# Altium PCB Mjollnir Prototype.PcbDoc (part 2 of 2)
Units mm, origin at the board's own origin, x right, y up, seen from the top; angles counter-clockwise.
Board outline 52 x 52 mm, 8 copper layers (S OT, G OU, S IU, G UD, G ID, S ID, G OD, S OD), stack 1.193 mm thick; 277 components, 187 nets, 947 pads, 173 vias.
Unrouted connection lines stored in the file: 461.
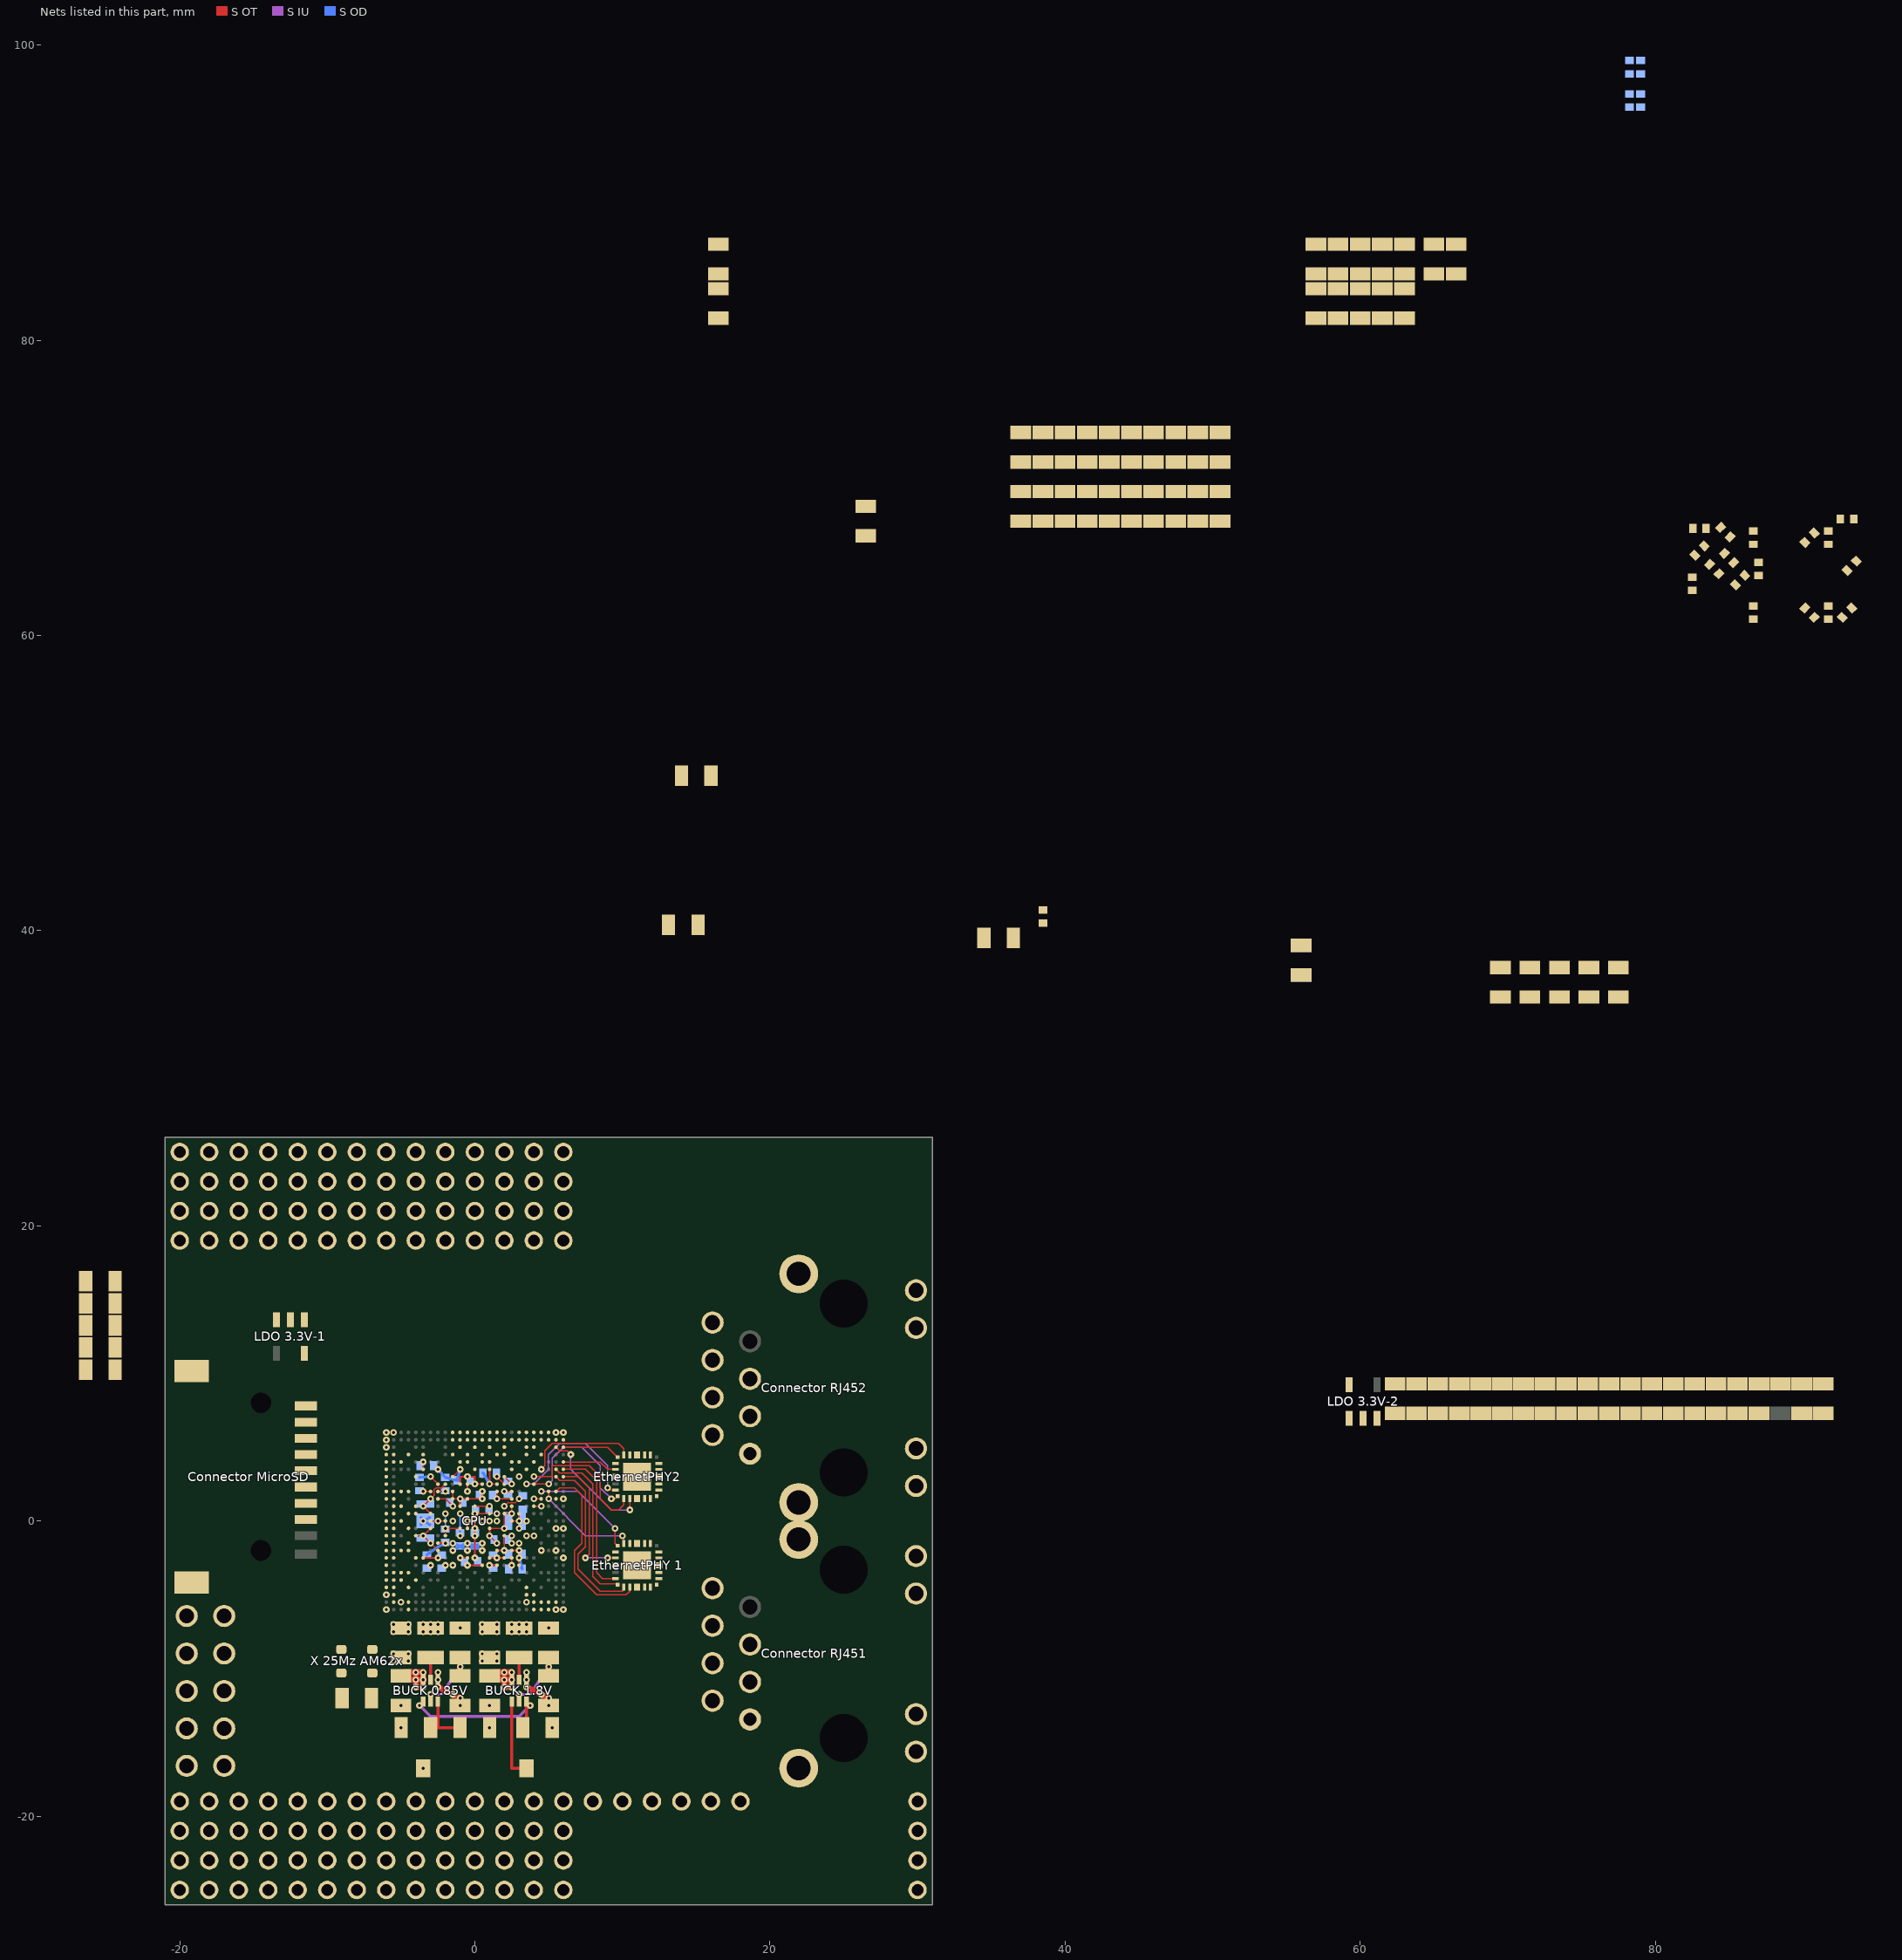
[diagram p8: the nets of this part, all layers, seen from the top]

## Part data
"BUCK 0.85V" "BUCK 1.8V": library part "Buck TLV62585PDLR", "Buck 3A 1500Mhz", MANUFACTURER_NAME="Texas Instruments", MANUFACTURER_PART_NUMBER=XTPS566247DRLR, Price="Rs. 24"
"C 1.8V Crystal" "C AM62x 0.85V-1" "C AM62x 0.85V-2" "C AM62x 0.85V-3" "C AM62x 0.85V-4" "C AM62x 0.85V-5" "C AM62x 0.85V-6" "C AM62x 0.85V-7" "C AM62x 0.85V-8" "C AM62x 0.85V-9" "C AM62x 0.85V-10" "C AM62x 0.85V-11" "C AM62x 0.85V-12" "C AM62x 0.85V-13" "C AM62x 0.85V-14" "C AM62x 1.8V-1" "C AM62x 1.8V-2" "C AM62x 1.8V-3" "C AM62x 1.8V-4" "C AM62x 1.8V-5" "C AM62x 1.8V-6" "C AM62x 1.8V-7" "C AM62x 1.8V-8" "C AM62x 1.8V-9" "C AM62x 1.8V-10" "C AM62x 1.8V-11" "C AM62x 1.8V-12" "C AM62x 1.8V-13" "C AM62x 1.8V-14" "C AM62x 3.3V-1" "C Backup-1" "C Backup-2" "C Backup-3" "C Backup-4" "C Backup-5" "C Backup-6" "C Backup-7" "C Backup-8" "C Backup-9" "C Backup-10" "C Backup-11" "C Backup-12" "C BUCK-0.85V-IN" "C BUCK-0.85V-OUT1" "C BUCK-1.8V-IN" "C BUCK-1.8V-OUT1" "C CAP_SOC VDDS5" "C EthernetPHY1-1" "C EthernetPHY1-2" "C EthernetPHY2-1" "C EthernetPHY2-2" "C EthernetPHY Earth" "C LDO 3.3V-1-IN" "C LDO 3.3V-1-OUT" "C LDO 3.3V-2-IN" "C LDO 3.3V-2-OUT" "C MMC-1" "C RJ451 RD1" "C RJ451 TD1" "C RJ452 RD1" "C RJ452 TD1": library part Capacitor, "Capacitor"
"Connector 1.8V Aux-1" "Connector 1.8V Aux-2" "Connector 5V-1" "Connector 5V-2" "Connector 5V-3" "Connector 5V-4" "Connector GND1" "Connector GND2" "Connector GND3" "Connector GND4" "Connector GND5" "Connector GND6" "Connector GND7" "Connector GND8" "Connector GND9" "Connector GND11" "Connector GND12" "Connector GND13" "Connector GND14" "Connector GND15" "Connector GND16" "Connector GND17" "Connector GND18" "Connector GND19" "Connector GND20" "Connector I2C0 SCL" "Connector I2C0 SDA" "Connector I2C1 SCL" "Connector I2C1 SDA" "Connector I2C2 SDA" "Connector IGBT UH" "Connector IGBT UL" "Connector IGBT VH" "Connector IGBT VL" "Connector IGBT WH" "Connector IGBT WL" "Connector JTAG 5V" "Connector JTAG GND-1" "Connector JTAG GND-2" "Connector JTAG RST" "Connector JTAG TCK" "Connector JTAG TDI" "Connector JTAG TDO" "Connector JTAG TMS" "Connector JTAG TX" "Connector JTAG UART RX" "Connector MCAN RX" "Connector MCAN TX" "Connector MCU I2C SCL" "Connector MCU I2C SDA" "Connector MCU MCAN0 RX" "Connector MCU MCAN0 TX" "Connector MCU MCAN1 RX" "Connector MCU MCAN1 TX" "Connector MCU RESETSTATZ" "Connector MCU SPI CLK" "Connector MCU SPI CS0" "Connector MCU SPI CS1" "Connector MCU SPI D0" "Connector MCU SPI D1" "Connector MCU UART CTS" "Connector MCU UART RTS" "Connector MCU UART RX" "Connector MCU UART TX" "Connector PRU0_GPIO0" "Connector PRU0_GPIO1" "Connector PRU0_GPIO2" "Connector PRU0_GPIO3" "Connector PRU0_GPIO4" "Connector PRU0_GPIO5" "Connector PRU0_GPIO6" "Connector PRU0_GPIO7" "Connector PRU0_GPIO8" "Connector PRU0_GPIO9" "Connector PRU0_GPIO10" "Connector PRU0_GPIO11" "Connector PRU0_GPIO12" "Connector PRU0_GPIO13" "Connector PRU0_GPIO14" "Connector PRU0_GPIO15" "Connector PRU0_GPIO16" "Connector PRU0_GPIO17" "Connector PRU0_GPIO18" "Connector PRU0_GPIO19" "Connector PRU1_GPIO0" "Connector PRU1_GPIO1" "Connector PRU1_GPIO2" "Connector PRU1_GPIO3" "Connector PRU1_GPIO4" "Connector PRU1_GPIO5" "Connector PRU1_GPIO6" "Connector PRU1_GPIO7" "Connector PRU1_GPIO8" "Connector PRU1_GPIO9" "Connector PRU1_GPIO10" "Connector PRU1_GPIO11" "Connector PRU1_GPIO12" "Connector PRU1_GPIO13" "Connector PRU1_GPIO14" "Connector PRU1_GPIO15" "Connector PRU1_GPIO16" "Connector PRU1_GPIO17" "Connector PRU1_GPIO18" "Connector PRU1_GPIO19" "Connector R5F CLOCKOUT" "Connector R5F I2C SCL" "Connector R5F I2C SDA" "Connector R5F UART CTS" "Connector R5F UART RTS" "Connector R5F UART RX" "Connector R5F UART TX" "Connector SPI CS0" "Connector SPI CS1" "Connector SPI D0" "Connector SPI D1" "Connector SPL CLK" "Connector UART0 FL" "Connector UART0 RX" "Connector UART0 TX" "Connector UART1 FL" "Connector UART1 RX" "Connector UART1 TX" "Connector UART2 RX" "Connector UART2 TX" "Connector UART3 RX" "Connector UART3 TX" "Connector UART4 RX" "Connector UART4 TX" "Connector UART5 RX" "Connector UART5 TX" "Connector UART6 RX" "Connector UART6 TX": "BergStrip"
"Connector MicroSD": library part "Connector MicroSD SameSky MSD-11-A", "MicroSD Slot", Link=https://roboticsdna.in/product/micro-sd-card-socket-adapter-self-pop-up-memory-card-slot-holder-2-pcs/, Price="Rs. 11"
"Connector RJ451" "Connector RJ452": "RJ45 With Magnetics 10/100Mbps"
CPU: "Quad Core A53", Price="Rs. 3113"
EthernetPHY2 "EthernetPHY 1": "PHY 10/100 Mbps", MANUFACTURER_NAME="Texas Instruments", MANUFACTURER_PART_NUMBER=DP83825IRMQR, Copyright="Copyright (C) 2025 Ultra Librarian. All rights reserved.", Datasheet=https://www.ti.com/lit/gpn/dp83825i, RefDes=RefDes, Type=Type
"L Buck 0.85V" "L Buck 1.8V": library part Inductor, "https://robu.in/product/tfm201610alm-1r0mtaa-tdk-3-1a-1uh-%c2%b120-4-3a-50m%cf%89-smd1-6x2mm-inductors-smd-rohs/"
"LDO 3.3V-1" "LDO 3.3V-2": library part "LDO TLV743xxPDBV", "LDO 300mA", MANUFACTURER_NAME="Texas Instruments", Datasheet=https://www.ti.com/lit/gpn/tlv755p, MANUFACTURER_PART_NUMBER=TLV743xxPDBV, Price="Rs. 9"
LED0 LED1 LED2 LED3 "LED 0.85V" "LED 1.8V" "LED 3.3V-1" "LED 3.3V-2" "LED 5V" "LED IGBT UH" "LED IGBT UL" "LED IGBT VH" "LED IGBT VL" "LED IGBT WH" "LED IGBT WL": library part LED, "LED"
"MDIO Pullup" "MMC SDCD Pulldown" "R BootStrap Down 3" "R BootStrap Down 4" "R BootStrap Down 5" "R BootStrap Down 7" "R BootStrap Down 8" "R BootStrap Down 10" "R BootStrap Down 11" "R BootStrap Down 12" "R BootStrap Down 13" "R BootStrap Down 14" "R BootStrap Down 15" "R BootStrap Up 0" "R BootStrap Up 1" "R BootStrap Up 2" "R BootStrap Up 6" "R BootStrap Up 9" "R BUCK-0.85V Divider-H" "R BUCK-0.85V Divider-L" "R BUCK-0.85V PG" "R BUCK-1.8V Divider-H" "R BUCK-1.8V Divider-L" "R BUCK-1.8V PG" "R EthernetPHY1 LED Act" "R EthernetPHY1 LED USER" "R EthernetPHY2 LED Act" "R EthernetPHY2 LED USER" "R EthernetPHY Earth" "R JTAG Pulldown RST" "R JTAG TDO" "R LED0" "R LED1" "R LED2" "R LED3" "R LED 0.85V" "R LED 1.8V" "R LED 3.3V-1" "R LED 3.3V-2" "R LED 5V" "R LED IGBT UH" "R LED IGBT UL" "R LED IGBT VH" "R LED IGBT VL" "R LED IGBT WH" "R LED IGBT WL" "R MCU_PORZ" "R MMC PULLUP CMD" "R MMC PULLUP D0" "R MMC PULLUP D1" "R MMC PULLUP D2" "R MMC PULLUP D3" "R RBIAS EthernetPHY1" "R RBIAS EthernetPHY2" "RMII2 Strap Address 1": library part Resistor, "Resistor"
"X 25Mz AM62x": "Crystal Oscilator CMOS Output", MANUFACTURER_NAME=ECS, MANUFACTURER_PART_NUMBER=ECS-2520MV-250-CN-TR, Mouser Part Number=520-2520MV-250-CN-T, Datasheet Link=https://www.arrow.com/en/products/ecs-2520mv-250-cn-tr/ecs-international, Geometry.Height=0.9mm, Mouser Price/Stock=https://www.mouser.co.uk/ProductDetail/ECS/ECS-2520MV-250-CN-TR?qs=fAHHVMwC%252BbiTva9uv8VI%2Fw%3D%3D

## Via types
v1: diameter 0.45, hole 0.2, S OT to S OD, tented both sides, 173 vias

## Nets (pads, with @x,y where several pads share a name; then routed paths per layer and width w, separated by ;. In a path a pad name is that pad's centre, name@x,y a point inside that pad or via, vN(x,y) a via of type N, cw(c..) or ccw(c..) an arc to the next point about the centre after c; other vN are vias at no path point)
0.85V: "C AM62x 0.85V-1.2" "C AM62x 0.85V-2.2" "C AM62x 0.85V-3.2" "C AM62x 0.85V-4.2" "C AM62x 0.85V-5.2" "C AM62x 0.85V-6.2" "C AM62x 0.85V-7.2" "C AM62x 0.85V-8.2" "C AM62x 0.85V-9.2" "C AM62x 0.85V-10.2" "C AM62x 0.85V-11.2" "C AM62x 0.85V-12.2" "C AM62x 0.85V-13.2" "C AM62x 0.85V-14.2" "C BUCK-0.85V-OUT1.2" "L Buck 0.85V.2" "LED 0.85V.1" "R BUCK-0.85V Divider-H.2" CPU.F8 CPU.H8 CPU.J11 CPU.J12 CPU.J14 CPU.K16 CPU.K17 CPU.L12 CPU.L15 CPU.M16 CPU.N8 CPU.N11 CPU.N12 CPU.N13 CPU.N14 CPU.P16 CPU.P17 CPU.R11 CPU.R12 CPU.R14 CPU.T10 CPU.U12 CPU.U14 CPU.V8 CPU.V15 CPU.V17 | length 16.2
  S OT w0.1: CPU.F8@-3.5,-2.5 v1(-2.5,-2.5) ; CPU.J11@-2,-1 v1(-2,-0.5) CPU.L12@-1,-0.5 ; CPU.K17@-1.5,2 CPU.K16@-1.5,1.5 v1(-1,1.5) ; CPU.L15@-1,1 v1(-1,1.5) ; v1(0,-2.5) v1(0,-1) v1(0,-0.5) CPU.N13@0,0 v1(0,0.5) CPU.R14@1,0.5 ; v1(0.5,2) v1(0.5,1.5) CPU.M16@-0.5,1.5 v1(-1,1.5) ; v1(1.5,-1.5) v1(1,-1) CPU.R12@1,-0.5 v1(2,-0.5) CPU.U14@2,0.5 v1(2.5,0.5) CPU.V15@2.5,1 ; v1(2,2) CPU.V17@2.5,2 ; v1(2.5,-3) CPU.V8@2.5,-2.5
  S OD w0.1: v1(-2,-0.5) v1(-2,0.5)
  other v1: -5.5,-7.5 -4.5,-7.5 -3.5,-7.5 -3,-7.5 -2.5,-7.5 -1,-7.25 -5.5,-7 -4.5,-7 -3.5,-7 -3,-7 -2.5,-7
"0.85V PG": "BUCK 0.85V.6" "R BUCK-0.85V PG.1" "R MCU_PORZ.1" CPU.D2 EthernetPHY2.5 | length 3.8
  S OT w0.2: -3,-14 -2.5,-14 ; -2.5,-12.24 -2.5,-14 ; -1,-14 -2.5,-14
1.8V: "C 1.8V Crystal.2" "C AM62x 1.8V-1.2" "C AM62x 1.8V-2.2" "C AM62x 1.8V-3.2" "C AM62x 1.8V-4.2" "C AM62x 1.8V-5.2" "C AM62x 1.8V-6.2" "C AM62x 1.8V-7.2" "C AM62x 1.8V-8.2" "C AM62x 1.8V-9.2" "C AM62x 1.8V-10.2" "C AM62x 1.8V-11.2" "C AM62x 1.8V-12.2" "C AM62x 1.8V-13.2" "C AM62x 1.8V-14.2" "C BUCK-1.8V-OUT1.2" "C EthernetPHY1-2.1" "C EthernetPHY2-2.1" "Connector 1.8V Aux-1.1" "Connector 1.8V Aux-2.1" "EthernetPHY 1.19" "L Buck 1.8V.2" "LED 1.8V.1" "R BUCK-0.85V PG.2" "R BUCK-1.8V Divider-H.2" "RMII2 Strap Address 1.2" "X 25Mz AM62x.1" "X 25Mz AM62x.4" CPU.E11 CPU.F11 CPU.F15 CPU.F20 CPU.G7 CPU.G10 CPU.G12 CPU.G14 CPU.G16 CPU.H9 CPU.J18 CPU.L11 CPU.L14 CPU.L18 CPU.M19 CPU.N18 CPU.P18 CPU.T7 CPU.T9 CPU.T19 CPU.U11 CPU.U15 CPU.U18 CPU.W16 CPU.W19 EthernetPHY2.19 | length 14.1
  S OT w0.083: -2.75,1.75 -2.75,2.125 -2.625,2.25 -2.25,2.25 CPU.J18@-2,2.5 ; 2.25,1.25 2.75,1.25
  S OT w0.1: CPU.E11@-4,-1 v1(-3.5,-1) ; CPU.F20@-3.5,3.5 v1(-3.5,4) ; CPU.G12@-3,-0.5 v1(-3.5,-1) ; CPU.G14@-3,0.5 v1(-3.5,1) v1(-3,1.5) -2.75,1.75 ; CPU.H9@-2.5,-2 v1(-3,-1.5) v1(-3.5,-1) ; CPU.L18@-1,2.5 -1,3 v1(-0.5,3) 0,3 v1(0,2.5) CPU.P18@0.5,2.5 ; v1(1,-3) CPU.T7@1.5,-3 ; CPU.T9@1.5,-2 v1(2,-2) CPU.U11@2,-1 ; v1(1.5,3) CPU.U18@2,2.5 ; v1(2,1) 2.25,1.25 ; 2.75,1.25 v1(3,1.5)
  S OD w0.1: v1(-1,-1) -1,-0.8 v1(-1,0.5)
  other v1: 1,-14 0.5,-7.5 1.5,-7.5 2.5,-7.5 3,-7.5 3.5,-7.5 5,-7.25 0.5,-7 1.5,-7 2.5,-7 3,-7 3.5,-7 -3,-3 3,3
"1.8V PG": "BUCK 0.85V.4" "BUCK 1.8V.6" "R BUCK-1.8V PG.1" | length 9.9
  S OT w0.2: 3.5,-14 3.5,-12.5 3.5,-12.24
  S IU w0.2: v1(-3.75,-12.5) -3,-13.25 3,-13.25 v1(3.75,-12.5)
3.3V: "EthernetPHY 1.3" "MDIO Pullup.1" "R BootStrap Up 0.2" "R BootStrap Up 1.2" "R BootStrap Up 6.2" "R BootStrap Up 9.2" EthernetPHY2.3
3.3V-1: "C AM62x 3.3V-1.2" "C LDO 3.3V-1-OUT.1" "C MMC-1.2" "Connector MicroSD.4" "LDO 3.3V-1.5" "LED 3.3V-1.1" "R MMC PULLUP CMD.1" "R MMC PULLUP D0.1" "R MMC PULLUP D1.1" "R MMC PULLUP D2.1" "R MMC PULLUP D3.1" CPU.G17 | length 0.5
  S OT w0.1: v1(-3.5,2) CPU.G17@-3,2
3.3V-2: "C EthernetPHY1-1.2" "C EthernetPHY2-1.1" "C LDO 3.3V-2-OUT.1" "EthernetPHY 1.5" "EthernetPHY 1.6" "LDO 3.3V-2.5" "LED 3.3V-2.1" EthernetPHY2.6
"3.3V-2 Enable": "LDO 3.3V-2.3"
5V: "BUCK 0.85V.3" "BUCK 1.8V.3" "C Backup-1.2" "C Backup-2.2" "C Backup-3.2" "C Backup-4.2" "C Backup-5.2" "C Backup-6.2" "C Backup-7.2" "C Backup-8.2" "C Backup-9.2" "C Backup-10.2" "C Backup-11.2" "C Backup-12.2" "C BUCK-0.85V-IN.2" "C BUCK-1.8V-IN.2" "C LDO 3.3V-1-IN.1" "C LDO 3.3V-2-IN.1" "Connector 5V-1.1" "Connector 5V-2.1" "Connector 5V-3.1" "Connector 5V-4.1" "Connector JTAG 5V.1" "LDO 3.3V-1.1" "LDO 3.3V-1.3" "LDO 3.3V-2.1" "LED 5V.1" "R BUCK-1.8V PG.2" | length 11.4
  S OT w0.4: v1(-4,-10.75) v1(-4,-11.25) v1(-3.5,-11.25) v1(-3.5,-10.75) ; v1(-4,-10.75) -4.75,-10.75 -5,-10.5 -4.75,-10.25 v1(-4,-10.25) ; v1(-4,-10.75) v1(-3.5,-10.75) ; v1(-4,-10.75) v1(-4,-10.25) ; v1(-4,-10.25) v1(-3.5,-10.25) v1(-3.5,-10.75) ; v1(2,-10.75) v1(2,-11.25) v1(2.5,-11.25) v1(2.5,-10.75) ; v1(2,-10.75) 1.25,-10.75 1,-10.5 1.25,-10.25 v1(2,-10.25) ; v1(2,-10.75) v1(2.5,-10.75) ; v1(2,-10.75) v1(2,-10.25) ; v1(2,-10.25) v1(2.5,-10.25) v1(2.5,-10.75)
  other v1: 5.25,-14
25Mhz: "X 25Mz AM62x.3" CPU.B2
"Buck 0.85V Feedback": "BUCK 0.85V.5" "R BUCK-0.85V Divider-H.1" "R BUCK-0.85V Divider-L.2" | length 4.3
  S OT w0.4: -1,-10.5 v1(-1,-9.875) -1,-9.25
  S IU w0.2: v1(-3,-11.75) -2.25,-11.75 v1(-1,-9.875)
"Buck 0.85V Inductor": "BUCK 0.85V.2" "L Buck 0.85V.1" | length 1.5
  S OT w0.2: -3,-10.76 -3,-9.25
"Buck 1.8V Feedback": "BUCK 1.8V.5" "R BUCK-1.8V Divider-H.1" "R BUCK-1.8V Divider-L.2" | length 4.3
  S OT w0.4: 5,-10.5 v1(5,-9.875) 5,-9.25
  S IU w0.2: v1(3,-11.75) 3.75,-11.75 v1(5,-9.875)
"Buck 1.8V Inductor": "BUCK 1.8V.2" "L Buck 1.8V.1" | length 1.5
  S OT w0.2: 3,-10.76 3,-9.25
"CAP_SOC VDDS5": "C CAP_SOC VDDS5.1" CPU.H17 | length 0.5
  S OT w0.1: CPU.H17@-2.5,2 v1(-2,2)
EARTH: "C EthernetPHY Earth.1" "Connector RJ451.8" "Connector RJ451.SH" "Connector RJ452.8" "Connector RJ452.SH" "R EthernetPHY Earth.1"
Enable: "BUCK 1.8V.4" Button.1 | length 5.5
  S OT w0.2: 2.5,-12.24 2.5,-16.75 Button.1@3.5,-16.75
Error: CPU.D1
"Ethernet1 RD_N": "Connector RJ451.6" "EthernetPHY 1.7"
"Ethernet1 RD_P": "Connector RJ451.3" "EthernetPHY 1.8"
"Ethernet1 TD_N": "Connector RJ451.2" "EthernetPHY 1.10"
"Ethernet1 TD_P": "Connector RJ451.1" "EthernetPHY 1.11"
"Ethernet2 RD_N": "Connector RJ452.6" EthernetPHY2.7
"Ethernet2 RD_P": "Connector RJ452.3" EthernetPHY2.8
"Ethernet2 TD_N": "Connector RJ452.2" EthernetPHY2.10
"Ethernet2 TD_P": "Connector RJ452.1" EthernetPHY2.11
"EthernetPHY1 LED Act": "EthernetPHY 1.4" "R EthernetPHY1 LED Act.2"
"EthernetPHY1 RBIAS": "EthernetPHY 1.14" "R RBIAS EthernetPHY1.1"
"EthernetPHY2 LED Act": "R EthernetPHY2 LED Act.2" EthernetPHY2.4
"EthernetPHY2 RBIAS": "R RBIAS EthernetPHY2.1" EthernetPHY2.14
GND: "BUCK 0.85V.1" "BUCK 1.8V.1" "C 1.8V Crystal.1" "C AM62x 0.85V-1.1" "C AM62x 0.85V-2.1" "C AM62x 0.85V-3.1" "C AM62x 0.85V-4.1" "C AM62x 0.85V-5.1" "C AM62x 0.85V-6.1" "C AM62x 0.85V-7.1" "C AM62x 0.85V-8.1" "C AM62x 0.85V-9.1" "C AM62x 0.85V-10.1" "C AM62x 0.85V-11.1" "C AM62x 0.85V-12.1" "C AM62x 0.85V-13.1" "C AM62x 0.85V-14.1" "C AM62x 1.8V-1.1" "C AM62x 1.8V-2.1" "C AM62x 1.8V-3.1" "C AM62x 1.8V-4.1" "C AM62x 1.8V-5.1" "C AM62x 1.8V-6.1" "C AM62x 1.8V-7.1" "C AM62x 1.8V-8.1" "C AM62x 1.8V-9.1" "C AM62x 1.8V-10.1" "C AM62x 1.8V-11.1" "C AM62x 1.8V-12.1" "C AM62x 1.8V-13.1" "C AM62x 1.8V-14.1" "C AM62x 3.3V-1.1" "C Backup-1.1" "C Backup-2.1" "C Backup-3.1" "C Backup-4.1" "C Backup-5.1" "C Backup-6.1" "C Backup-7.1" "C Backup-8.1" "C Backup-9.1" "C Backup-10.1" "C Backup-11.1" "C Backup-12.1" "C BUCK-0.85V-IN.1" "C BUCK-0.85V-OUT1.1" "C BUCK-1.8V-IN.1" "C BUCK-1.8V-OUT1.1" "C CAP_SOC VDDS5.2" "C EthernetPHY1-1.1" "C EthernetPHY1-2.2" "C EthernetPHY2-1.2" "C EthernetPHY2-2.2" "C EthernetPHY Earth.2" "C LDO 3.3V-1-IN.2" "C LDO 3.3V-1-OUT.2" "C LDO 3.3V-2-IN.2" "C LDO 3.3V-2-OUT.2" "C MMC-1.1" "C RJ451 RD1.1" "C RJ451 TD1.1" "C RJ452 RD1.1" "C RJ452 TD1.1" "Connector GND1.1" "Connector GND2.1" "Connector GND3.1" "Connector GND4.1" "Connector GND5.1" "Connector GND6.1" "Connector GND7.1" "Connector GND8.1" "Connector GND9.1" "Connector GND11.1" "Connector GND12.1" "Connector GND13.1" "Connector GND14.1" "Connector GND15.1" "Connector GND16.1" "Connector GND17.1" "Connector GND18.1" "Connector GND19.1" "Connector GND20.1" "Connector JTAG GND-1.1" "Connector JTAG GND-2.1" "Connector MicroSD.6" "Connector MicroSD.SH" "Connector RJ451.10" "Connector RJ451.11" "Connector RJ452.10" "Connector RJ452.11" "EthernetPHY 1.9" "EthernetPHY 1.21" "EthernetPHY 1.25" "LDO 3.3V-1.2" "LDO 3.3V-2.2" "MMC SDCD Pulldown.1" "R BootStrap Down 3.1" "R BootStrap Down 4.1" "R BootStrap Down 5.1" "R BootStrap Down 7.1" "R BootStrap Down 8.1" "R BootStrap Down 10.1" "R BootStrap Down 11.1" "R BootStrap Down 12.1" "R BootStrap Down 13.1" "R BootStrap Down 14.1" "R BootStrap Down 15.1" "R BootStrap Up 2.1" "R BUCK-0.85V Divider-L.1" "R BUCK-1.8V Divider-L.1" "R EthernetPHY Earth.2" "R JTAG Pulldown RST.2" "R LED0.1" "R LED1.1" "R LED2.1" "R LED3.1" "R LED 0.85V.1" "R LED 1.8V.1" "R LED 3.3V-1.1" "R LED 3.3V-2.1" "R LED 5V.1" "R LED IGBT UH.1" "R LED IGBT UL.1" "R LED IGBT VH.1" "R LED IGBT VL.1" "R LED IGBT WH.1" "R LED IGBT WL.1" "R MCU_PORZ.2" "R RBIAS EthernetPHY1.2" "R RBIAS EthernetPHY2.2" "X 25Mz AM62x.2" Button.2 CPU.A1 CPU.A3 CPU.A23 CPU.A24 CPU.A25 CPU.AA11 CPU.AB9 CPU.AD1 CPU.AD9 CPU.AD12 CPU.AD16 CPU.AD25 CPU.AE1 CPU.AE8 CPU.AE12 CPU.AE16 CPU.AE24 CPU.AE25 CPU.B25 CPU.C2 CPU.F13 CPU.G13 CPU.G19 CPU.H10 CPU.H13 CPU.H16 CPU.H18 CPU.H20 CPU.J7 CPU.J13 CPU.K7 CPU.K9 CPU.K10 CPU.K13 CPU.K15 CPU.K19 CPU.L8 CPU.L20 CPU.M7 CPU.M8 CPU.M9 CPU.M10 CPU.M12 CPU.M13 CPU.M17 CPU.M18 CPU.N15 CPU.P7 CPU.P9 CPU.P10 CPU.P13 CPU.R8 CPU.R13 CPU.R15 CPU.R18 CPU.R20 CPU.T8 CPU.T13 CPU.T14 CPU.T16 CPU.T17 CPU.T18 CPU.U8 CPU.U19 CPU.V9 CPU.V10 CPU.V11 CPU.V13 CPU.V16 CPU.V18 CPU.W7 CPU.W9 CPU.W10 CPU.W12 CPU.W13 CPU.W14 CPU.Y2 CPU.Y11 CPU.Y13 EthernetPHY2.9 EthernetPHY2.21 EthernetPHY2.25 | length 30
  S OT w0.1: CPU.G13@-3,0 v1(-2.5,0) CPU.J13@-2,0 ; v1(-3,3) CPU.H18@-2.5,2.5 ; CPU.H10@-2.5,-1.5 v1(-2,-1.5) ; CPU.H16@-2.5,1.5 -2,1.5 v1(-1.5,1) ; CPU.K19@-1.5,3 v1(-1,3.5) ; v1(-1,-2.5) CPU.M8@-0.5,-2.5 ; v1(-0.5,-3) CPU.P7@0.5,-3 ; CPU.M12@-0.5,-0.5 v1(-0.5,0) ; v1(-0.5,2) CPU.M18@-0.5,2.5 ; CPU.N15@0,1 v1(1,1) ; CPU.R8@1,-2.5 v1(1.5,-2.5) CPU.U8@2,-2.5 ; CPU.R20@1,3.5 v1(1,2.5) CPU.T18@1.5,2.5 ; CPU.T17@1.5,2 v1(1.5,1.5) CPU.V16@2.5,1.5 ; CPU.U19@2,3 v1(2.5,2.5) ; CPU.V9@2.5,-2 v1(3,-2) ; CPU.V13@2.5,0 v1(3,0) CPU.W14@3,0.5 ; CPU.W7@3,-3 v1(3,-2.5)
  S OT w0.4: v1(-2.5,-11.25) -2,-11.5 v1(-1.5,-11.75) v1(-1,-12) ; v1(3.5,-11.25) 4,-11.5 v1(4.5,-11.75) v1(5,-12)
  S OD w0.2: -3.75,2.95 v1(-3,3) ; -3.65,-0.25 v1(-3.5,0) ; -3.65,0.25 v1(-3.5,0) ; -3.25,-2.3 -2.5,-1.75 v1(-2,-1.5) ; -3.05,-0.25 -3.262,-0.132 v1(-3.5,0) ; -3.05,0.25 -3.262,0.132 v1(-3.5,0) ; v1(-2.5,3.5) -2,2.95 -1.2,2.75 v1(-1,3.5) ; v1(-1.5,-2) -1,-1.7 ; v1(-1.5,-1.5) -1,-1.7 ; v1(0.5,-2) 0,-1.7 ; v1(0.5,-1.5) 0,-1.7 ; 0.55,3.25 v1(1,2.5) ; v1(3,-2.5) 3.2,-3.25 ; -1,-1.7 v1(-0.5,-2) 0,-1.7 ; -1,-1.7 v1(-0.5,-1.5) 0,-1.7
  other v1: -3.5,-16.75 -5,-14 -5,-12.5 -1,-12.5 1,-12.5 5,-12.5 -2.5,-10.75 3.5,-10.75 -2.5,-10.25 3.5,-10.25 -5.5,-9.5 -4.5,-9.5 0.5,-9.5 1.5,-9.5 -5.5,-9 -4.5,-9 0.5,-9 1.5,-9 -6,-6 5.5,-6 6,-6 -5,-5.5 3.5,-5.5 -6,-5 -2,-3 -1.5,-3 6,-2.5 4.5,-2 5.5,-2 2.5,-1.5 3,-1.5 2.5,-1 3.5,-1 4,-1 3,-0.5 5.5,-0.5 6,-0.5 -1.5,0 0.5,0 1,0 1.5,0 3.5,0 1.5,0.5 6,1.5 -6,5 -6,5.5 -6,6 -5.5,6 5.5,6 6,6
"I2C0 SCL": "Connector I2C0 SCL.1" CPU.B16
"I2C0 SDA": "Connector I2C0 SDA.1" CPU.A16
"I2C1 SCL": "Connector I2C1 SCL.1" CPU.B17
"I2C1 SDA": "Connector I2C1 SDA.1" CPU.A17
"I2C2 SCL": "Connector I2C2 SDA.1" CPU.K24
"IGBT UH": "Connector IGBT UH.1" "LED IGBT UH.1" CPU.AB2
"IGBT UH*": "LED IGBT UH.2" "R LED IGBT UH.2"
"IGBT UL": "Connector IGBT UL.1" "LED IGBT UL.1" CPU.Y4
"IGBT UL*": "LED IGBT UL.2" "R LED IGBT UL.2"
"IGBT VH": "Connector IGBT VH.1" "LED IGBT VH.1" CPU.AA3
"IGBT VH*": "LED IGBT VH.2" "R LED IGBT VH.2"
"IGBT VL": "Connector IGBT VL.1" "LED IGBT VL.1" CPU.AA1
"IGBT VL*": "LED IGBT VL.2" "R LED IGBT VL.2"
"IGBT WH": "Connector IGBT WH.1" "LED IGBT WH.1" CPU.AB1
"IGBT WH*": "LED IGBT WH.2" "R LED IGBT WH.2"
"IGBT WL": "Connector IGBT WL.1" "LED IGBT WL.1" CPU.Y3
"IGBT WL*": "LED IGBT WL.2" "R LED IGBT WL.2"
"Input 0": "Connector PRU0_GPIO0.1" "R BootStrap Up 0.1" CPU.M25
"Input 1": "Connector PRU0_GPIO1.1" "R BootStrap Up 1.1" CPU.N23
"Input 2": "Connector PRU0_GPIO2.1" "R BootStrap Up 2.2" CPU.N24
"Input 3": "Connector PRU0_GPIO3.1" "R BootStrap Down 3.2" CPU.N25
"Input 4": "Connector PRU0_GPIO4.1" "R BootStrap Down 4.2" CPU.P24
"Input 5": "Connector PRU0_GPIO5.1" "R BootStrap Down 5.2" CPU.P22
"Input 6": "Connector PRU0_GPIO6.1" "R BootStrap Up 6.1" CPU.P21
"Input 7": "Connector PRU0_GPIO7.1" "R BootStrap Down 7.2" CPU.R23
"Input 8": "Connector PRU0_GPIO8.1" CPU.P25
"Input 9": "Connector PRU0_GPIO9.1" CPU.L23
"Input 10": "Connector PRU0_GPIO10.1" CPU.L24
"Input 11": "Connector PRU0_GPIO11.1" CPU.L25
"Input 12": "Connector PRU0_GPIO12.1" CPU.M24
"Input 13": "Connector PRU0_GPIO13.1" CPU.N20
"Input 14": "Connector PRU0_GPIO14.1" CPU.U23
"Input 15": "Connector PRU0_GPIO15.1" CPU.K25
"Input 16": "Connector PRU0_GPIO16.1" CPU.M22
"Input 17": "Connector PRU0_GPIO17.1" CPU.M21
"Input 18": "Connector PRU0_GPIO18.1" CPU.L21
"Input 19/I2C2 SDA": "Connector PRU0_GPIO19.1" CPU.K22
"JTAG RST": "Connector JTAG RST.1" "R JTAG Pulldown RST.1" CPU.B10
"JTAG TCK": "Connector JTAG TCK.1" CPU.A10
"JTAG TDI": "Connector JTAG TDI.1" CPU.A11
"JTAG TDO": "Connector JTAG TDO.1" "R JTAG TDO.2"
"JTAG TDO*": "R JTAG TDO.1" CPU.D12
"JTAG TMS": "Connector JTAG TMS.1" CPU.B11
LED0: CPU.AC2 LED0.1
LED0*: "R LED0.2" LED0.2
LED1: CPU.AD2 LED1.1
LED1*: "R LED1.2" LED1.2
LED2: CPU.AC1 LED2.1
LED2*: "R LED2.2" LED2.2
LED3: CPU.AA2 LED3.1
LED3*: "R LED3.2" LED3.2
"LED 0.85V": "LED 0.85V.2" "R LED 0.85V.2"
"LED 1.8V": "LED 1.8V.2" "R LED 1.8V.2"
"LED 3.3V-1": "LED 3.3V-1.2" "R LED 3.3V-1.2"
"LED 3.3V-2": "LED 3.3V-2.2" "R LED 3.3V-2.2"
"LED 5V": "LED 5V.2" "R LED 5V.2"
"MCAN RX": "Connector MCAN RX.1" CPU.E15
"MCAN TX": "Connector MCAN TX.1" CPU.C15
"MCU I2C SCL": "Connector MCU I2C SCL.1" CPU.A8
"MCU I2C SDA": "Connector MCU I2C SDA.1" CPU.D10
"MCU MCAN0 RX": "Connector MCU MCAN0 RX.1" CPU.B3
"MCU MCAN0 TX": "Connector MCU MCAN0 TX.1" CPU.D6
"MCU MCAN1 RX": "Connector MCU MCAN1 RX.1" CPU.D4
"MCU MCAN1 TX": "Connector MCU MCAN1 TX.1" CPU.E5
"MCU RESETSTATZ": "Connector MCU RESETSTATZ.1" CPU.B12
"MCU SPI CLK": "Connector MCU SPI CLK.1" CPU.A7
"MCU SPI CS0": "Connector MCU SPI CS0.1" CPU.E8
"MCU SPI CS1": "Connector MCU SPI CS1.1" CPU.B8
"MCU SPI D0": "Connector MCU SPI D0.1" CPU.D9
"MCU SPI D1": "Connector MCU SPI D1.1" CPU.C9
"MCU UART CTS": "Connector MCU UART CTS.1" CPU.A6
"MCU UART RTS": "Connector MCU UART RTS.1" CPU.B6
"MCU UART RX": "Connector MCU UART RX.1" CPU.B5
"MCU UART TX": "Connector MCU UART TX.1" CPU.A5
MDC: "EthernetPHY 1.16" CPU.AD24 EthernetPHY2.16
MDIO: "EthernetPHY 1.15" "MDIO Pullup.2" CPU.AB22 EthernetPHY2.15
MMC_CLK: "Connector MicroSD.3" CPU.B22
MMC_CMD: "Connector MicroSD.5" "R MMC PULLUP CMD.2" CPU.A21
MMC_D0: "Connector MicroSD.7" "R MMC PULLUP D0.2" CPU.A22
MMC_D1: "Connector MicroSD.8" "R MMC PULLUP D1.2" CPU.B21
MMC_D2: "Connector MicroSD.1" "R MMC PULLUP D2.2" CPU.C21
MMC_D3: "Connector MicroSD.2" "R MMC PULLUP D3.2" CPU.D22
"Output 0": "Connector PRU1_GPIO0.1" CPU.U22
"Output 1": "Connector PRU1_GPIO1.1" CPU.V24
"Output 2": "Connector PRU1_GPIO2.1" CPU.W25
"Output 3": "Connector PRU1_GPIO3.1" CPU.W24
"Output 4": "Connector PRU1_GPIO4.1" CPU.Y25
"Output 5": "Connector PRU1_GPIO5.1" CPU.Y24
"Output 6": "Connector PRU1_GPIO6.1" CPU.Y23
"Output 7": "Connector PRU1_GPIO7.1" CPU.AA25
"Output 8": "Connector PRU1_GPIO8.1" CPU.W21
"Output 9": "Connector PRU1_GPIO9.1" CPU.V20
"Output 10": "Connector PRU1_GPIO10.1" CPU.AA23
"Output 11": "Connector PRU1_GPIO11.1" CPU.AB25
"Output 12": "Connector PRU1_GPIO12.1" CPU.AA24
"Output 13": "Connector PRU1_GPIO13.1" CPU.Y22
"Output 14": "Connector PRU1_GPIO14.1" CPU.AA21
"Output 15": "Connector PRU1_GPIO15.1" CPU.AB24
"Output 16": "Connector PRU1_GPIO16.1" CPU.V21
"Output 17": "Connector PRU1_GPIO17.1" CPU.Y20
"Output 18": "Connector PRU1_GPIO18.1" CPU.AC25
"Output 19": "Connector PRU1_GPIO19.1" CPU.AC24
"R5F CLOCKOUT": "Connector R5F CLOCKOUT.1" CPU.A12
"R5F I2C SCL": "Connector R5F I2C SCL.1" CPU.B9
"R5F I2C SDA": "Connector R5F I2C SDA.1" CPU.A9
"R5F UART CTS": "Connector R5F UART CTS.1" CPU.A4
"R5F UART RTS": "Connector R5F UART RTS.1" CPU.C6
"R5F UART RX": "Connector R5F UART RX.1" CPU.B4
"R5F UART TX": "Connector R5F UART TX.1" CPU.C5
"RJ451 LED_Y+": "Connector RJ451.12" "R EthernetPHY1 LED Act.1"
"RJ451 RD~": "C RJ451 RD1.2" "Connector RJ451.5"
"RJ451 TD~": "C RJ451 TD1.2" "Connector RJ451.4"
"RJ452 LED_Y+": "Connector RJ452.12" "R EthernetPHY2 LED Act.1"
"RJ452 RD~": "C RJ452 RD1.2" "Connector RJ452.5"
"RJ452 TD~": "C RJ452 TD1.2" "Connector RJ452.4"
"RMII1 CLK": "EthernetPHY 1.2" CPU.AD17 | length 12.3
  S OT w0.083: CPU.AD17@5.5,2 5.75,2.25 6.75,2.25 7.25,1.75 7.25,-1.5 6.75,-2 6.75,-3.5 8.25,-5 10.25,-5 10.5,-4.75 10.5,-4.475
"RMII1 CRS_DV": "EthernetPHY 1.20" CPU.AE19 | length 8.9
  S OT w0.083: CPU.AE19@6,3 7,3 7.75,2.25 7.75,-2.25 v1(7.5,-2.5) ; v1(9,-2.5) 9.525,-2.5
  S IU w0.083: v1(7.5,-2.5) v1(9,-2.5)
"RMII1 LED": "R EthernetPHY1 LED USER.1" CPU.AA15 | length 0.5
  S OT w0.083: CPU.AA15@4,1 v1(4.5,1)
"RMII1 LED*": "Connector RJ451.9" "R EthernetPHY1 LED USER.2"
"RMII1 RX_D0": "EthernetPHY 1.18" CPU.AB17 | length 7.3
  S OT w0.083: v1(9.5,-0.5) 9.5,-1.5 9.675,-1.675
  S IU w0.083: v1(4.5,2) 7,2 v1(9.5,-0.5)
"RMII1 RX_D1": "EthernetPHY 1.17" CPU.AC17 | length 7.1
  S OT w0.083: v1(5,1.5) CPU.AC17@5,2 ; v1(10,-1) 10.1,-1.1 10.1,-1.525
  S IU w0.083: v1(5,1.5) 7.5,-1 v1(10,-1)
"RMII1 TX_D0": "EthernetPHY 1.23" CPU.AE20 | length 10.3
  S OT w0.083: CPU.AE20@6,3.5 7.5,3.5 8.25,2.75 8.25,-3.5 8.65,-3.9 9.525,-3.9
"RMII1 TX_D1": "EthernetPHY 1.24" CPU.AD20 | length 11.1
  S OT w0.083: CPU.AD20@5.5,3.5 5.75,3.25 7.25,3.25 8,2.5 8,-3.75 8.5,-4.25 9.6,-4.25 9.675,-4.325
"RMII1 TX_EN": "EthernetPHY 1.1" CPU.AD19 | length 11.8
  S OT w0.083: CPU.AD19@5.5,3 5.75,2.75 6.75,2.75 7.5,2 7.5,-1.75 7,-2.25 7,-3.25 8.5,-4.75 10,-4.75 10.1,-4.65 10.1,-4.475
"RMII2 CLK": CPU.AD23 EthernetPHY2.2 | length 8.1
  S OT w0.083: CPU.AD23@5.5,5 5.75,4.75 6.25,4.75 v1(6.5,4.5) ; v1(10.5,0.75) EthernetPHY2.2@10.5,1.525
  S IU w0.083: v1(6.5,4.5) 6.5,3.5 9.25,0.75 v1(10.5,0.75)
"RMII2 CRS_DV": CPU.AE21 EthernetPHY2.20 | length 3.7
  S OT w0.083: CPU.AE21@6,4 8.5,4 9,3.5 EthernetPHY2.20@9.525,3.5
"RMII2 LED": "R EthernetPHY2 LED USER.1" CPU.AB16 | length 0.5
  S OT w0.083: v1(4,1.5) CPU.AB16@4.5,1.5
"RMII2 LED*": "Connector RJ452.9" "R EthernetPHY2 LED USER.2"
"RMII2 RX_D0": CPU.AE23 EthernetPHY2.18 | length 4
  S OT w0.083: CPU.AE23@6,5 9,5 EthernetPHY2.18@9.675,4.325
"RMII2 RX_D1": CPU.AB20 EthernetPHY2.17 | length 7.5
  S OT w0.083: v1(4.5,3.5) 4.75,3.75 4.75,4.75 5.25,5.25 9.75,5.25 10.1,4.9 EthernetPHY2.17@10.1,4.475
"RMII2 TX_D0": CPU.Y18 EthernetPHY2.23 | length 9.9
  S OT w0.083: v1(9,2.25) 9.15,2.1 EthernetPHY2.23@9.525,2.1
  S IU w0.083: v1(3.5,2.5) 4,2.5 4.98,3.48 4.98,4.48 5.75,5.25 7.5,5.25 9,3.75 v1(9,2.25)
"RMII2 TX_D1": CPU.AA18 EthernetPHY2.24 | length 10
  S OT w0.083: CPU.AA18@4,2.5 v1(5,2.5) ; v1(9.25,1.5) 9.5,1.5 EthernetPHY2.24@9.675,1.675
  S IU w0.083: v1(5,2.5) 5.25,2.75 5.25,4.25 6,5 7.25,5 8.5,3.75 8.5,2.25 v1(9.25,1.5)
"RMII2 TX_EN": CPU.AA19 EthernetPHY2.1 | length 9.5
  S OT w0.083: v1(4,3) 4.5,3 5.25,3 5.25,3.75 7.75,3.75 8.5,3 8.5,2.5 8.5,1.5 9.25,0.75 9.75,0.75 10.1,1.1 EthernetPHY2.1@10.1,1.525
RMIICLK: "EthernetPHY 1.13" CPU.A18 EthernetPHY2.13
"SPI CLK": "Connector SPL CLK.1" CPU.A14
"SPI CS0": "Connector SPI CS0.1" CPU.A13
"SPI CS1": "Connector SPI CS1.1" CPU.C13
"SPI D0": "Connector SPI D0.1" CPU.B13
"SPI D1": "Connector SPI D1.1" CPU.B14
Status: CPU.F22
"UART0 FL": "Connector UART0 FL.1" CPU.B15
"UART0 RX": "Connector JTAG UART RX.1" "Connector UART0 RX.1" CPU.D14
"UART0 TX": "Connector JTAG TX.1" "Connector UART0 TX.1" CPU.E14
"UART1 FL": "Connector UART1 FL.1" CPU.A19
"UART1 RX": "Connector UART1 RX.1" CPU.E19
"UART1 TX": "Connector UART1 TX.1" CPU.A20
"UART2 RX": "Connector UART2 RX.1" "R BootStrap Down 8.2" CPU.R24
"UART2 TX": "Connector UART2 TX.1" "R BootStrap Up 9.1" CPU.R25
"UART3 RX": "Connector UART3 RX.1" "R BootStrap Down 10.2" CPU.T25
"UART3 TX": "Connector UART3 TX.1" "R BootStrap Down 11.2" CPU.R21
"UART4 RX": "Connector UART4 RX.1" "R BootStrap Down 12.2" CPU.T22
"UART4 TX": "Connector UART4 TX.1" "R BootStrap Down 13.2" CPU.T24
"UART5 RX": "Connector UART5 RX.1" "R BootStrap Down 14.2" CPU.U25
"UART5 TX": "Connector UART5 TX.1" "R BootStrap Down 15.2" CPU.U24
"UART6 RX": "Connector UART6 RX.1" "MMC SDCD Pulldown.2" CPU.D17
"UART6 TX": "Connector UART6 TX.1" CPU.C17
pads on no net: "Connector MicroSD.9" "Connector MicroSD.10" "Connector MicroSD." "Connector RJ451.7" "Connector RJ451." "Connector RJ452.7" "Connector RJ452." "EthernetPHY 1.12" "EthernetPHY 1.22" "LDO 3.3V-1.4" "LDO 3.3V-2.4" "RMII2 Strap Address 1.1" CPU.A2 CPU.A15 CPU.AA5 CPU.AA7 CPU.AA8 CPU.AA12 CPU.AA14 CPU.AB4 CPU.AB6 CPU.AB10 CPU.AB12 CPU.AB14 CPU.AC5 CPU.AC6 CPU.AC9 CPU.AC11 CPU.AC13 CPU.AC15 CPU.AC20 CPU.AC21 CPU.AD3 CPU.AD4 CPU.AD5 CPU.AD6 CPU.AD7 CPU.AD8 CPU.AD10 CPU.AD11 CPU.AD13 CPU.AD14 CPU.AD15 CPU.AD18 CPU.AD21 CPU.AD22 CPU.AE2 CPU.AE3 CPU.AE4 CPU.AE5 CPU.AE6 CPU.AE7 CPU.AE9 CPU.AE10 CPU.AE11 CPU.AE13 CPU.AE14 CPU.AE15 CPU.AE17 CPU.AE18 CPU.AE22 CPU.B1 CPU.B7 CPU.B18 CPU.B19 CPU.B20 CPU.B23 CPU.B24 CPU.C1 CPU.C11 CPU.C20 CPU.C24 CPU.C25 CPU.D16 CPU.D20 CPU.D24 CPU.D25 CPU.E1 CPU.E2 CPU.E3 CPU.E7 CPU.E12 CPU.E18 CPU.E21 CPU.E23 CPU.E24 CPU.E25 CPU.F1 CPU.F2 CPU.F3 CPU.F4 CPU.F6 CPU.F18 CPU.F23 CPU.F24 CPU.F25 CPU.G1 CPU.G2 CPU.G5 CPU.G9 CPU.G21 CPU.G24 CPU.G25 CPU.H1 CPU.H2 CPU.H5 CPU.H6 CPU.H11 CPU.H15 CPU.H21 CPU.H24 CPU.H25 CPU.J1 CPU.J2 CPU.J3 CPU.J4 CPU.J8 CPU.J19 CPU.J22 CPU.J23 CPU.J24 CPU.J25 CPU.K1 CPU.K2 CPU.K3 CPU.K4 CPU.K18 CPU.L1 CPU.L2 CPU.L5 CPU.L6 CPU.M1 CPU.M2 CPU.M4 CPU.M5 CPU.N1 CPU.N2 CPU.N3 CPU.N6 CPU.P1 CPU.P2 CPU.P4 CPU.P5 CPU.P19 CPU.R1 CPU.R2 CPU.R3 CPU.R5 CPU.R6 CPU.T1 CPU.T2 CPU.T4 CPU.U1 CPU.U2 CPU.U3 CPU.U4 CPU.U7 CPU.V1 CPU.V2 CPU.V5 CPU.V6 CPU.V25 CPU.W1 CPU.W2 CPU.W5 CPU.W17 CPU.Y1 CPU.Y6 CPU.Y8 CPU.Y15 EthernetPHY2.12 EthernetPHY2.22

## Polygon pours and split planes (outlines as drawn)
5V on S OD "5V" (solid, remove dead copper, shelved, pour order 2): -25.75,25.75 -25.75,-25.75 25.75,-25.75 25.75,25.75
0.85V on S IU "0.85V" (solid, remove dead copper, shelved, pour order 0): -5.75,-8.25 -5.75,-6.5 -4,-6.5 -4,3.75 -0.25,3.75 -0.25,3.25 0.25,3.25 0.25,3.75 2.25,3.75 2.25,3.25 2.75,3.25 2.75,3.75 3.5,3.75 3.5,-8.25
1.8V on S ID "1.8V" (solid, remove dead copper, shelved, pour order 1): -4,4.25 -3,4.25 -3,3.75 -0.25,3.75 -0.25,3.25 0.25,3.25 0.25,3.75 2.25,3.75 2.25,3.25 2.75,3.25 2.75,3.75 3.5,3.75 3.5,-6.5 5.75,-6.5 5.75,-8.25 -4,-8.25
GND on G UD (split plane): 30.49,-25.49 -20.49,-25.49 -20.49,25.49 30.49,25.49
GND on G OD (split plane): 30.49,-25.49 -20.49,-25.49 -20.49,25.49 30.49,25.49
GND on G OU (split plane): 30.49,-25.49 -20.49,-25.49 -20.49,25.49 30.49,25.49
GND on G ID (split plane): 30.49,-25.49 -20.49,-25.49 -20.49,25.49 30.49,25.49

## Text inside footprints (layer, text, board x,y; h text height)
"BUCK 0.85V": Mechanical 13 "RefDes2" at -3.635,-9.277 h1.27 r270
"BUCK 1.8V": Mechanical 13 "RefDes2" at 2.365,-9.277 h1.27 r270
"C 1.8V Crystal": Top Overlay "C" at -7.733,-11.6 h0.8 r180
"C Backup-1": Top Overlay "C" at 63.4,85.233 h0.8 r90
"C Backup-2": Top Overlay "C" at 61.9,85.233 h0.8 r90
"C Backup-3": Top Overlay "C" at 60.4,85.233 h0.8 r90
"C Backup-4": Top Overlay "C" at 58.9,85.233 h0.8 r90
"C Backup-5": Top Overlay "C" at 57.4,85.233 h0.8 r90
"C Backup-6": Top Overlay "C" at 62.6,82.767 h0.8 r270
"C Backup-7": Top Overlay "C" at 61.1,82.767 h0.8 r270
"C Backup-8": Top Overlay "C" at 59.6,82.767 h0.8 r270
"C Backup-9": Top Overlay "C" at 58.1,82.767 h0.8 r270
"C Backup-10": Top Overlay "C" at 56.6,82.767 h0.8 r270
"C Backup-11": Bottom Overlay "C" at 55.6,37.733 h0.8 r270
"C Backup-12": Top Overlay "C" at 56.4,37.733 h0.8 r90
"C BUCK-0.85V-IN": Top Overlay "C" at -4.6,-11.767 h0.8 r90
"C BUCK-0.85V-OUT1": Top Overlay "C" at -4.6,-8.517 h0.8 r90
"C BUCK-1.8V-IN": Top Overlay "C" at 1.4,-11.767 h0.8 r90
"C BUCK-1.8V-OUT1": Top Overlay "C" at 1.4,-8.517 h0.8 r90
"C EthernetPHY1-1": Top Overlay "C" at 71.472,8.029 h0.8 r90
"C EthernetPHY1-2": Top Overlay "C" at 70.022,8.029 h0.8 r90
"C EthernetPHY2-1": Top Overlay "C" at 72.922,8.029 h0.8 r90
"C EthernetPHY2-2": Top Overlay "C" at 75.822,8.029 h0.8 r90
"C EthernetPHY Earth": Top Overlay "C" at 74.372,8.029 h0.8 r90
"C LDO 3.3V-1-IN": Top Overlay "C" at 13.858,40 h0.8
"C LDO 3.3V-1-OUT": Top Overlay "C" at 73.9,36.233 h0.8 r90
"C LDO 3.3V-2-IN": Top Overlay "C" at 68.572,8.029 h0.8 r90
"C LDO 3.3V-2-OUT": Top Overlay "C" at 62.772,8.029 h0.8 r90
"C MMC-1": Top Overlay "C" at 15.267,50.9 h0.8 r180
"C RJ451 RD1": Top Overlay "C" at 65.672,8.029 h0.8 r90
"C RJ451 TD1": Top Overlay "C" at 77.272,8.029 h0.8 r90
"C RJ452 RD1": Top Overlay "C" at 87.422,8.029 h0.8 r90
"C RJ452 TD1": Top Overlay "C" at 85.972,8.029 h0.8 r90
EthernetPHY2: Mechanical 13 "*" at 10.835,2.071 h1.27 r90
"EthernetPHY 1": Mechanical 13 "*" at 10.835,-3.929 h1.27 r90
"L Buck 0.85V": Top Overlay "I" at -2.6,-8.383 h0.8 r90
"L Buck 1.8V": Top Overlay "I" at 3.4,-8.383 h0.8 r90
"LDO 3.3V-1": Mechanical 13 "RefDes2" at -13.135,14.722 h1.27 r270; Mechanical 13 "*" at -12.311,13.44 h1.27 r270
"LDO 3.3V-2": Mechanical 13 "RefDes2" at 60.832,5.875 h1.27 r90; Mechanical 13 "*" at 60.008,7.158 h1.27 r90
LED0: Top Overlay ">" at 37.4,72.55 h0.8 r90
LED1: Top Overlay ">" at 38.9,72.55 h0.8 r90
LED2: Top Overlay ">" at 40.4,72.55 h0.8 r90
LED3: Top Overlay ">" at 41.9,72.55 h0.8 r90
"LED 0.85V": Top Overlay ">" at 77.9,36.3 h0.8 r90
"LED 1.8V": Top Overlay ">" at 75.9,36.3 h0.8 r90
"LED 3.3V-1": Top Overlay ">" at 16.1,85.7 h0.8 r270
"LED 3.3V-2": Top Overlay ">" at 90.322,8.096 h0.8 r90
"LED 5V": Top Overlay ">" at 66.1,85.7 h0.8 r270
"LED IGBT UH": Top Overlay ">" at 44.1,72.95 h0.8 r270
"LED IGBT UL": Top Overlay ">" at 42.6,72.95 h0.8 r270
"LED IGBT VH": Top Overlay ">" at 47.1,72.95 h0.8 r270
"LED IGBT VL": Top Overlay ">" at 45.6,72.95 h0.8 r270
"LED IGBT WH": Top Overlay ">" at 50.1,72.95 h0.8 r270
"LED IGBT WL": Top Overlay ">" at 48.6,72.95 h0.8 r270
"MDIO Pullup": Top Overlay "R" at 26.9,67.483 h0.8 r90
"R BUCK-0.85V Divider-H": Top Overlay "R" at -0.6,-8.517 h0.8 r90
"R BUCK-0.85V Divider-L": Top Overlay "R" at -0.6,-11.767 h0.8 r90
"R BUCK-0.85V PG": Top Overlay "R" at -0.267,-14.4 h0.8
"R BUCK-1.8V Divider-H": Top Overlay "R" at 5.4,-8.517 h0.8 r90
"R BUCK-1.8V Divider-L": Top Overlay "R" at 5.4,-11.767 h0.8 r90
"R BUCK-1.8V PG": Top Overlay "R" at 3.983,-14.4 h0.8
"R EthernetPHY1 LED Act": Top Overlay "R" at 80.172,8.029 h0.8 r90
"R EthernetPHY1 LED USER": Top Overlay "R" at 78.722,8.029 h0.8 r90
"R EthernetPHY2 LED Act": Top Overlay "R" at 81.622,8.029 h0.8 r90
"R EthernetPHY2 LED USER": Top Overlay "R" at 84.522,8.029 h0.8 r90
"R EthernetPHY Earth": Top Overlay "R" at 83.072,8.029 h0.8 r90
"R JTAG TDO": Top Overlay "R" at 35.767,39.9 h0.8 r180
"R LED0": Top Overlay "R" at 37.4,68.483 h0.8 r90
"R LED1": Top Overlay "R" at 38.9,68.483 h0.8 r90
"R LED2": Top Overlay "R" at 40.4,68.483 h0.8 r90
"R LED3": Top Overlay "R" at 41.9,68.483 h0.8 r90
"R LED 0.85V": Top Overlay "R" at 71.9,36.233 h0.8 r90
"R LED 1.8V": Top Overlay "R" at 69.9,36.233 h0.8 r90
"R LED 3.3V-1": Top Overlay "R" at 16.9,82.233 h0.8 r90
"R LED 3.3V-2": Top Overlay "R" at 91.772,8.029 h0.8 r90
"R LED 5V": Top Overlay "R" at 64.6,85.767 h0.8 r270
"R LED IGBT UH": Top Overlay "R" at 44.1,69.017 h0.8 r270
"R LED IGBT UL": Top Overlay "R" at 42.6,69.017 h0.8 r270
"R LED IGBT VH": Top Overlay "R" at 47.1,69.017 h0.8 r270
"R LED IGBT VL": Top Overlay "R" at 45.6,69.017 h0.8 r270
"R LED IGBT WH": Top Overlay "R" at 50.1,69.017 h0.8 r270
"R LED IGBT WL": Top Overlay "R" at 48.6,69.017 h0.8 r270
"R MCU_PORZ": Top Overlay "R" at -3.733,-13.6 h0.8 r180
"R MMC PULLUP CMD": Top Overlay "R" at -25.108,13.65 h0.8 r180
"R MMC PULLUP D0": Top Overlay "R" at -25.108,12.15 h0.8 r180
"R MMC PULLUP D1": Top Overlay "R" at -25.108,10.65 h0.8 r180
"R MMC PULLUP D2": Top Overlay "R" at -25.108,16.65 h0.8 r180
"R MMC PULLUP D3": Top Overlay "R" at -25.108,15.15 h0.8 r180
"R RBIAS EthernetPHY1": Top Overlay "R" at 67.122,8.029 h0.8 r90
"R RBIAS EthernetPHY2": Top Overlay "R" at 64.222,8.029 h0.8 r90
"RMII2 Strap Address 1": Top Overlay "R" at 88.872,8.029 h0.8 r90